# Altium PCB caja conexion.PcbDoc
Units mil, origin at the board's own origin, x right, y up, seen from the top; angles counter-clockwise.
Board outline 5920 x 5130 mil, 2 copper layers (Top Layer, Bottom Layer); 69 components, 31 nets, 195 pads, 28 vias.
Unrouted connection lines stored in the file: 2.
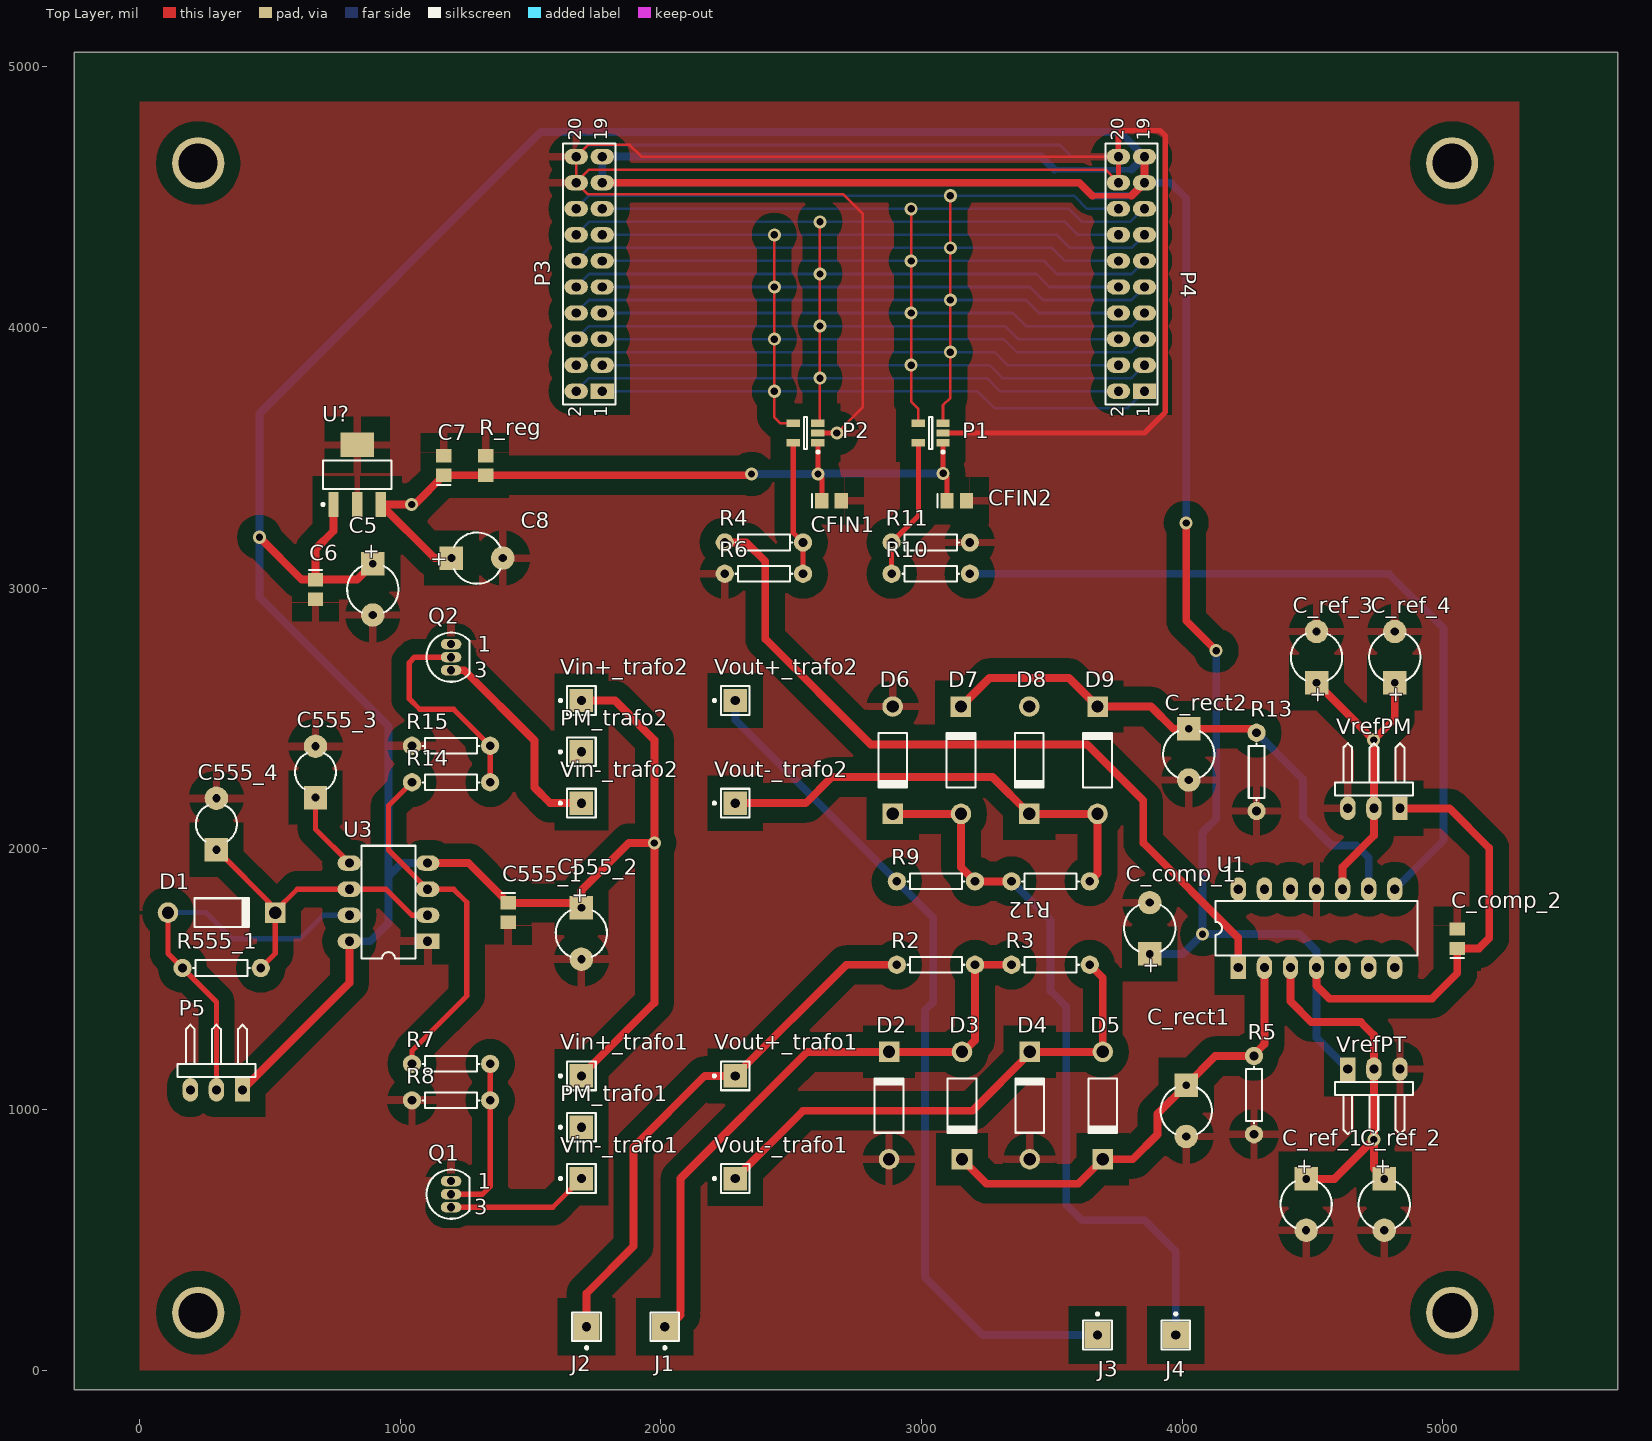
[diagram p0: Top Layer view]
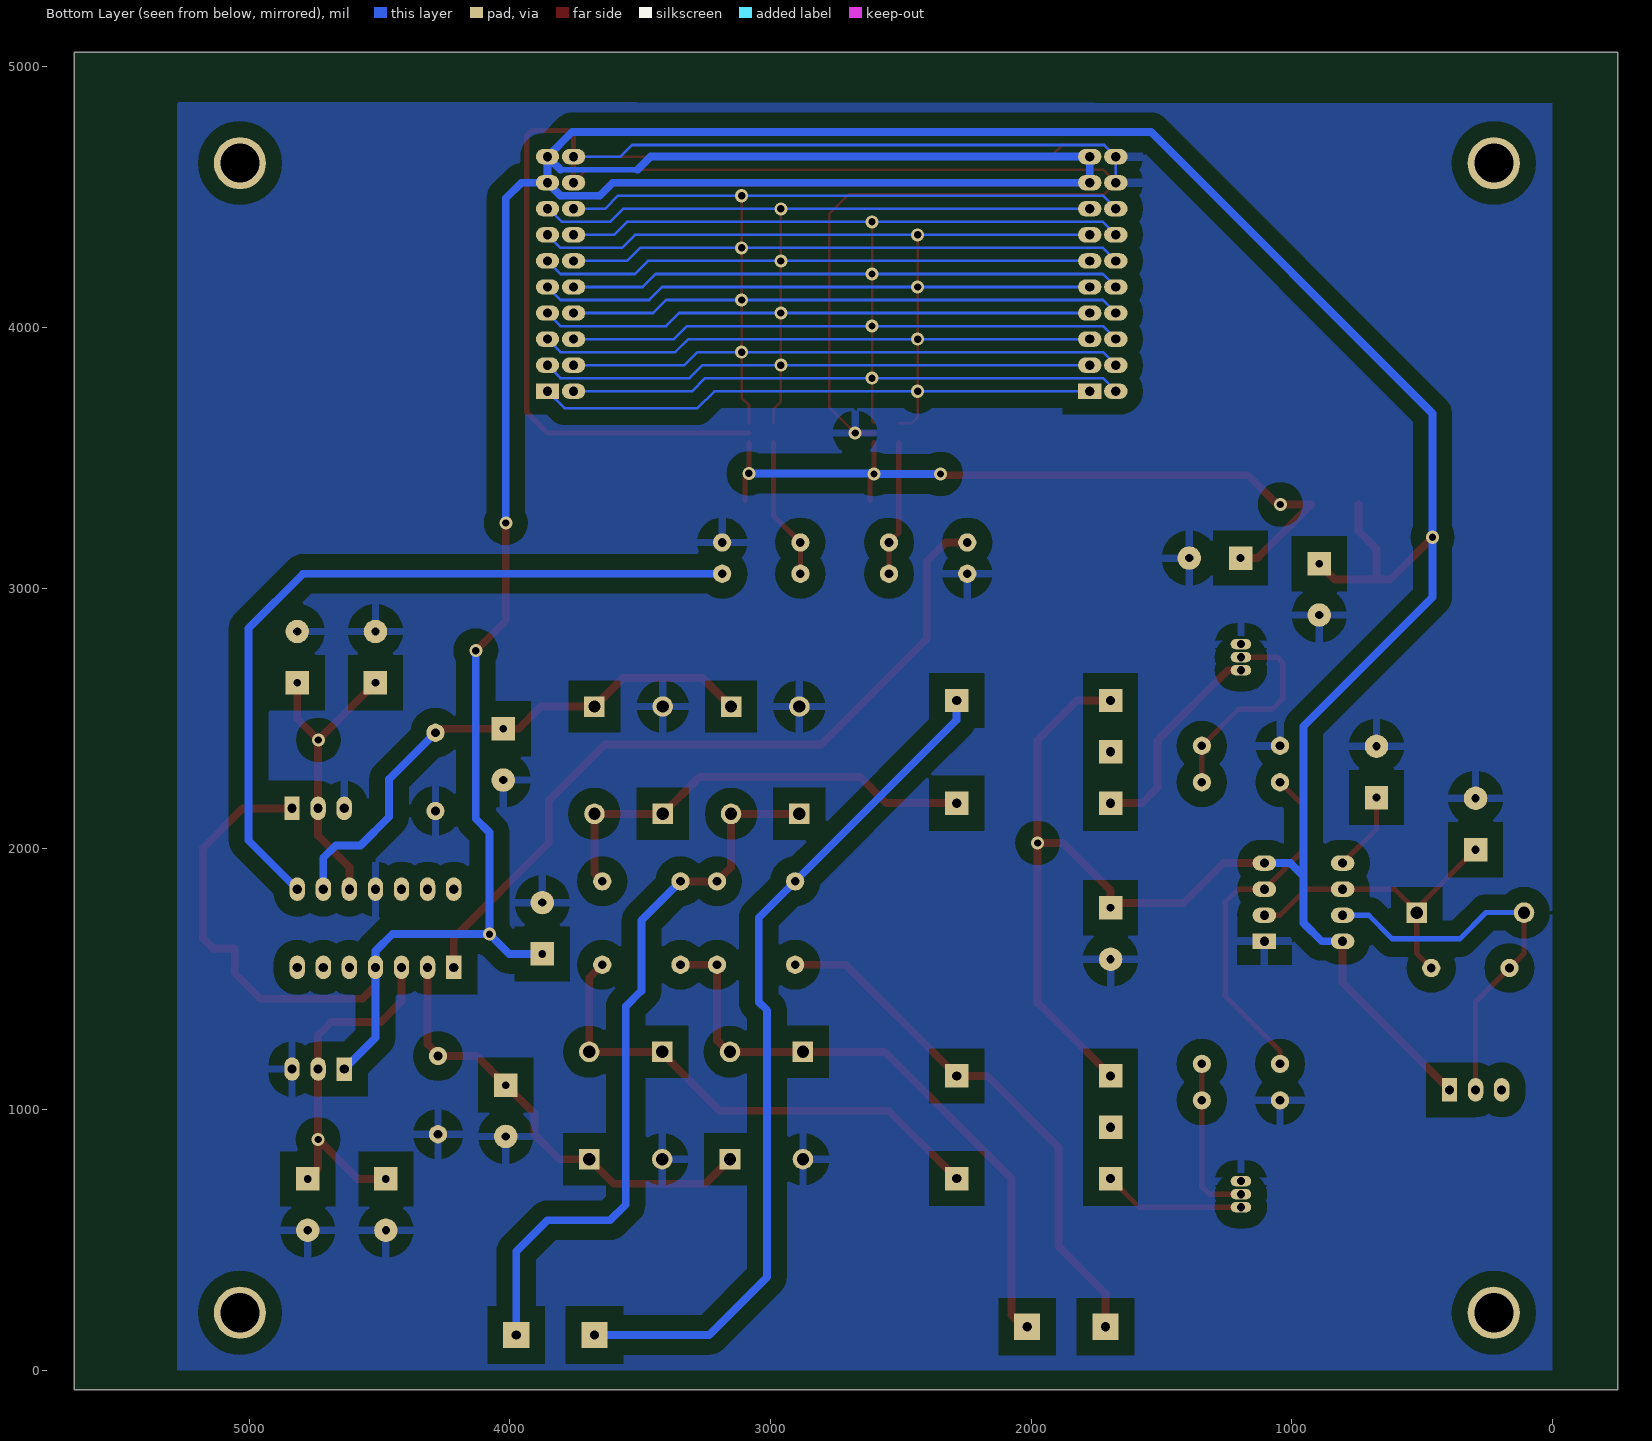
[diagram p1: Bottom Layer view, seen from below]

## Layer stack, top to bottom
Top Layer: signal copper 1.4
Dielectric: dielectric 12.6, FR-4, Dk 4.8
Bottom Layer: signal copper 1.4

## Board outline
-250,5055 -250,-75 5665,-75 5670,-75 5670,5055

## Design rules (kind name [scope] priority, off if disabled: settings)
Clearance [All] p1: gap=60
PolygonConnect PolygonConnect_1 [All vs IsNamedPolygon('TOP_ISO') Or  IsNamedPolygon('TOP_ISO')] p1: connectstyle=Relief reliefconductorwidth=30 reliefentries=4 polygonreliefangle="90 Angle"
PolygonConnect [All] p2: connectstyle=Relief reliefconductorwidth=10 reliefentries=4 polygonreliefangle="90 Angle"
RoomDefinition trafo2 [InComponentClass('trafo2')] p1: confinementstyle=ConfineIn formatcopy=TRUE lockcomponents=FALSE outline -420,-20 5655,-20 5655,5830 -420,5830
RoomDefinition trafo1 [InComponentClass('trafo1')] p2: confinementstyle=ConfineIn formatcopy=TRUE lockcomponents=FALSE outline -185,-20 5490,-20 5490,4995 -185,4995
RoomDefinition conexion [InComponentClass('conexion')] p3: confinementstyle=ConfineIn formatcopy=TRUE lockcomponents=FALSE outline -525,-65 6460,-65 6460,5235 -525,5235
RoutingVias [All] p1: holewidth=28 width=50 viastyle="Through Hole" minholewidth=28 minwidth=50 maxholewidth=28 maxwidth=50
SilkscreenOverComponentPads [All] p1: minsilkscreentomaskgap=10
SolderMaskExpansion [All] p1: expansion=4
TestPointUsage [All] p1: valid=0 allowmultiple=FALSE
Testpoint [All] p1: side=3 testpointundercomponent=TRUE minsize=40 maxsize=100 preferedsize=60 minholesize=0 maxholesize=40 preferedholesize=32 testpointgrid=1 style=297 order=0-112345678
Width [All] p1: maxlimit=100 minlimit=20 preferedwidth=20
23 further rules are at their usual default settings.

## Classes and differential pairs
component class conexion: C5 C6 C7 C8 C555_1 C555_2 C555_3 C555_4 C? C_comp_1 C_comp_2 C_rect1 C_rect2 C_ref_1 C_ref_2 C_ref_3 C_ref_4 CFIN1 CFIN2 D1 D2 D3 D4 D5 D6 D7 D8 D9 J1 J2 J3 J4 P1 P2 P3 P4 P5 Q1 Q2 R2 R3 R4 R5 R6 R7 R8 R9 R10 R11 R12 R13 R14 R15 R555_1 R_reg U1 U3 U? VrefPM VrefPT
component class trafo1: PM_trafo1 Vin+_trafo1 Vin-_trafo1 Vout+_trafo1 Vout-_trafo1
component class trafo2: PM_trafo2 Vin+_trafo2 Vin-_trafo2 Vout+_trafo2 Vout-_trafo2
channel class trafo: trafo1 trafo2

## Components (designator, comment, footprint, x,y, rotation, side; value= is the part's Value field where it differs from the comment)
C5 "Cap Pol1" CAPPR5-5x5 895,2995 r270 top
C6 "Cap Pol3" C0805 675,2995 r270 top
C7 "Cap Pol3" C0805 1167.5,3470 r90 top
C8 "Cap Pol1" CAPPR5-5x5 1295,3115 r0 top
C555_1 "Cap Pol3" C0805 1415,1755 r270 top
C555_2 "Cap Pol1" CAPPR5-5x5 1695,1675 r270 top
C555_3 "Cap2" CAPR5-4X5 675,2295 r90 top
C555_4 "Cap2" CAPR5-4X5 295,2095 r90 top
C_comp_1 "Cap Pol1" CAPPR5-5x5 3875,1695 r90 top
C_comp_2 "Cap Pol3" C0805 5055,1655 r90 top
C_rect1 "Cap Pol1" CAPPR5-5x5 4015,995 r270 top
C_rect2 "Cap Pol1" CAPPR5-5x5 4025,2361.91 r270 top
C_ref_1 "Cap Pol1" CAPPR5-5x5 4475,635 r270 top
C_ref_2 "Cap Pol1" CAPPR5-5x5 4775,635 r270 top
C_ref_3 "Cap Pol1" CAPPR5-5x5 4515,2735 r90 top
C_ref_4 "Cap Pol1" CAPPR5-5x5 4815,2735 r90 top
CFIN1 "Cap Pol3" C0805 2655,3335 r0 top
CFIN2 "Cap Pol3" C0805 3135,3335 r0 top
D1 "1N4148" DO-41 315,1755 r0 top
D2 "1N4148" DO-41 2875,1015 r90 top
D3 "1N4148" DO-41 3155,1015 r270 top
D4 "1N4148" DO-41 3415,1015 r90 top
D5 "1N4148" DO-41 3695,1015 r270 top
D6 "1N4148" DO-41 2889,2339.66 r270 top
D7 "1N4148" DO-41 3151,2339.66 r90 top
D8 "1N4148" DO-41 3413,2339.66 r270 top
D9 "1N4148" DO-41 3675,2339.66 r90 top
J1 "PT" PIN1#1 2015,166.5 r180 top
J2 "Socket" PIN1#1 1715,166.5 r180 top
J3 "Socket" PIN1#1 3675,135 r0 top
J4 "PM" PIN1#1 3975,135 r0 top
P1 "FIN1001" SOT23-5AM 3035,3595 r180 top
P2 "FIN1001" SOT23-5AM 2555,3595 r180 top
P3 "Header 10X2" HDR2X10 1775,3755 r90 top
P4 "Header 10X2" HDR2X10 3855,3755 r90 top
P5 "pote 20K" HDR1X3H 395,1075 r180 top
PM_trafo1 "Socket" PIN1#2 1695,931.85 r90 top (schematic designator PM)
PM_trafo2 "Socket" PIN1#2 1695,2371.85 r90 top (schematic designator PM)
Q1 "BC337" SOT54 1195,675 r0 top
Q2 "BC337" SOT54 1195,2735 r0 top
R2 "Res1" AXIAL-0.3 3055,1555 r0 top
R3 "Res1" AXIAL-0.3 3495,1555 r180 top
R4 "Res1" AXIAL-0.3 2395,3175 r180 top
R5 "Res1" AXIAL-0.3 4275,1055 r90 top
R6 "Res1" AXIAL-0.3 2395,3055 r180 top
R7 "Res1" AXIAL-0.3 1195,1175 r0 top
R8 "Res1" AXIAL-0.3 1195,1035 r0 top
R9 "Res1" AXIAL-0.3 3055,1875 r0 top
R10 "Res1" AXIAL-0.3 3035,3055 r0 top
R11 "Res1" AXIAL-0.3 3035,3175 r0 top
R12 "Res1" AXIAL-0.3 3495,1875 r180 top
R13 "Res1" AXIAL-0.3 4285,2295 r90 top
R14 "Res1" AXIAL-0.3 1195,2255 r0 top
R15 "Res1" AXIAL-0.3 1195,2395 r0 top
R555_1 "Res1" AXIAL-0.3 315,1542.65 r180 top
R_reg "Res Semi" 2012[0805] 1327.5,3470 r270 top
U1 "LM324N" 646-06 4515,1695 r0 top
U3 "NE555N" DIP8 955,1795 r90 top
U? "LM3940IMP-3.3" MP04A_N 835,3435 r90 top
Vin+_trafo1 "Socket" PIN1#2 1695,1128.7 r90 top (schematic designator Vin+)
Vin+_trafo2 "Socket" PIN1#2 1695,2568.7 r90 top (schematic designator Vin+)
Vin-_trafo1 "Socket" PIN1#2 1695,735 r90 top (schematic designator Vin-)
Vin-_trafo2 "Socket" PIN1#2 1695,2175 r90 top (schematic designator Vin-)
Vout+_trafo1 "Socket" PIN1#2 2285.55,1128.7 r90 top (schematic designator Vout+)
Vout+_trafo2 "Socket" PIN1#2 2285.55,2568.7 r90 top (schematic designator Vout+)
Vout-_trafo1 "Socket" PIN1#2 2285.55,735 r90 top (schematic designator Vout-)
Vout-_trafo2 "Socket" PIN1#2 2285.55,2175 r90 top (schematic designator Vout-)
VrefPM "pote 20K" HDR1X3H 4835,2155 r180 top
VrefPT "pote 20K" HDR1X3H 4635,1155 r0 top

## Footprints (in the part's own frame and the unit in brackets; to place one, negate y for a bottom-side part, rotate by r counter-clockwise, add the part's x,y. Pads: shape width x height; smd on the part's side, far side on the other; paste and mask are expansions set on the pad)
646-06 [mm] "DIP; 14 Leads; Row Spacing 7.62 mm; Pitch 2.54 mm"
  rect 1.5x2.286 hole 0.9: 1(-7.62,-3.81)
  oval 1.5x2.286 hole 0.9: 2(-5.08,-3.81) 3(-2.54,-3.81) 4(0,-3.81) 5(2.54,-3.81) 6(5.08,-3.81) 7(7.62,-3.81) 8(7.62,3.81) 9(5.08,3.81) 10(2.54,3.81) 11(0,3.81) 12(-2.54,3.81) 13(-5.08,3.81) 14(-7.62,3.81)
  silkscreen extent -9.85,-2.65 9.85,2.65
2012[0805] [mm] "Chip Resistor; Body 2.0 x 1.3 mm (LxW typ)"
  rect 1.3x1.5 smd: 1(-0.95,0) 2(0.95,0)
AXIAL-0.3 [mil] "Resistor; 2 Leads"
  round 70 hole 33.46: 1(-150,0) 2(150,0)
  silkscreen extent -109,-30 109,30
C0805 [mm] "Chip Capacitor; Body 2.0 x 1.2 mm (LxW typ)"
  rect 1.3x1.5 smd: 1(-0.95,0) 2(0.95,0)
  silkscreen extent -1.9,-0.65 -1.9,0.65
CAPPR5-5x5 [mil] "Capacitor, Electrolytic, Radial; Body 5 x 5 mm (Dia.xH typ); Pin Spacing 5 mm (typ)"
  rect 90x90 hole 29.53: 1(-98.43,0)
  round 90 hole 31.5: 2(98.43,0)
  silkscreen extent -89,-98 89,98
CAPR5-4X5 [mil] "Capacitor; 2 Leads"
  rect 90x90 hole 31.5: 1(-98.43,0)
  round 90 hole 31.5: 2(98.43,0)
  silkscreen extent -66,-79 72,79
DIP8 [mm] "DIP; 8 Leads; Row Spacing 7.62 mm; Pitch 2.54 mm"
  rect 1.5x2.286 hole 0.9: 1(-3.81,-3.81)
  oval 1.5x2.286 hole 0.9: 2(-1.27,-3.81) 3(1.27,-3.81) 4(3.81,-3.81) 5(3.81,3.81) 6(1.27,3.81) 7(-1.27,3.81) 8(-3.81,3.81)
  silkscreen extent -5.5,-2.65 5.5,2.65
DO-41 [mm] "Diode, Axial; Body 5.2 x 2.7 mm (LxDia. max), Lead Dia. 0.86 mm (max)"
  round 2 hole 1.2: 1(-5.23,0)
  rect 2x2 hole 1.2: 2(5.23,0)
  silkscreen extent -2.65,-1.41 2.75,1.4
HDR1X3H [mm] "Connector; Header; 3 Position; Right Angle"
  rect 1.5x2.286 hole 0.9: 1(0,0)
  oval 1.5x2.286 hole 0.9: 2(2.54,0) 3(5.08,0)
  silkscreen extent -1.27,-6.35 6.35,-1.27
HDR2X10 [mm] "Connector; Header; 10x2 Position"
  rect 1.5x2.286 hole 0.9: 1(0,0)
  oval 1.5x2.286 hole 0.9: 2(0,2.54) 3(2.54,0) 4(2.54,2.54) 5(5.08,0) 6(5.08,2.54) 7(7.62,0) 8(7.62,2.54) 9(10.16,0) 10(10.16,2.54) 11(12.7,0) 12(12.7,2.54) 13(15.24,0) 14(15.24,2.54) 15(17.78,0) 16(17.78,2.54) 17(20.32,0) 18(20.32,2.54) 19(22.86,0) 20(22.86,2.54)
  silkscreen extent -1.27,-1.27 24.13,3.81
MP04A_N [mm] "SOT223, 4-Leads, Body 6.5x3.5mm, Pitch 2.3mm, Lead Span 7mm, IPC Medium Density"
  rect 2.4x1 smd: 1(-2.9,2.3) 2(-2.9,0) 3(-2.9,-2.3)
  rect 2.4x3.3 smd: 4(2.9,0)
  silkscreen extent -3.02,-3.35 1.4,3.47, body extent -1.85,-3.35 1.85,3.35, height 1.8
PIN1#1 [mm] "Connector; Plug"
  rect 2.54x2.54 hole 0.9: 1(0,0)
  silkscreen extent -1.4,-1.4 1.4,2.17
PIN1#2 [mm] "Connector; Plug"
  rect 2.286x2.286 hole 0.9: 1(0,0)
  silkscreen extent -1.4,-1.4 1.4,2.17
SOT23-5AM [mm] "SOT23, 5-Leads, Body 2.9x1.7mm, Pitch 0.95mm, Lead Span 2.8mm, IPC Low Density"
  rect 1.3x0.7 smd: 1(-1.2,0.95) 2(-1.2,0) 3(-1.2,-0.95) 4(1.2,-0.95) 5(1.2,0.95)
  silkscreen extent -1.33,-1.55 0.15,1.97, body extent -0.9,-1.55 0.9,1.55, height 1.45
SOT54 [mm] "TO, Flat Index; 3 In-Line, Axial Leads; Body Dia. 4.6mm; Leads 0.48 x 0.45 mm (max)"
  oval 2x1 hole 0.8: 1(0,1.27) 2(0,0) 3(0,-1.27)
  silkscreen extent -2.4,-2.4 1.8,2.4

## Part data
C5 C8 C555_2 C_comp_1 C_rect1 C_rect2 C_ref_1 C_ref_2 C_ref_3 C_ref_4: "Polarized Capacitor (Radial)"
C6 C7 C555_1 C_comp_2 CFIN1 CFIN2: "Polarized Capacitor (Surface Mount)"
C555_3 C555_4: "Capacitor"
D1 D2 D3 D4 D5 D6 D7 D8 D9: library part "Diode 1N4001", "1 Amp General Purpose Rectifier"
J1 J4: library part Socket, "Socket"
P1 P2: library part "Header 3X2", "Header, 3-Pin, Dual row"
P3 P4: "Header, 10-Pin, Dual row"
P5 VrefPM VrefPT: library part "Header 3H", "Header, 3-Pin, Right Angle"
Q1 Q2: "NPN General-purpose Transistor"
R2 R3 R4 R5 R6 R7 R8 R9 R10 R11 R12 R13 R14 R15 R555_1: "Resistor"
R_reg: "Semiconductor Resistor"
U1: "Quad Differential Input, Low-Power Operational Amplifier"
U3: "General-Purpose Single Bipolar Timer"
U?: "1A Low Dropout Regulator for 5V to 3.3V Conversion"

## Free pads (board coordinates)
  round 200 hole 150: 0(225,4630) 1(5035,4630) 2(5035,220) 3(225,220)

## Via types
v1: diameter 50, hole 28, Top Layer to Bottom Layer, 28 vias

## Nets (pads, with @x,y where several pads share a name; then routed paths per layer and width w, separated by ;. In a path a pad name is that pad's centre, name@x,y a point inside that pad or via, vN(x,y) a via of type N, cw(c..) or ccw(c..) an arc to the next point about the centre after c; other vN are vias at no path point)
3.3V: C7.1 C8.1 CFIN1.1 CFIN2.1 P1.1 P2.1 R_reg.2 U?.3 | length 3014.7
  Top Layer w20: P2.1 2602.24,3437.5 2617.6,3422.15 CFIN1.1 ; P1.1@3082.5,3557.34 v1(3082.5,3440) 3097.6,3424.9 CFIN2.1
  Top Layer w30: 1128.19,3118.19 U?.3 v1(1044.07,3320.83) 1055.73,3320.83 C7.1 R_reg.2 2342.4,3432.6 v1(2347.5,3437.7) ; 1131.38,3115 C8.1
  Bottom Layer w30: v1(2347.5,3437.7) v1@2615,3437.7 ; v1@2615,3440 v1(3082.5,3440)
  other v1: 2602.5,3437.5
_PM1+: P1.4 P3.3 P3.7 P3.11 P3.15 P4.3 P4.7 P4.11 P4.15 | length 9369.8
  Top Layer w10: v1(2960,4455) v1(2960,4255) v1(2960,4055) v1(2960,3855) 2960,3715 2987.76,3687.24 P1.4
  Bottom Layer w10: P3.3 v1(2960,3855) ; P3.7 v1(2960,4055) 3350,4055 3400,4005 3805,4005 P4.7 ; P3.11 v1(2960,4255) 3470,4255 3520,4205 3805,4205 P4.11 ; P3.15 v1(2960,4455) 3565,4455 3615,4405 3800,4405 3850,4455 P4.15 ; 3010,3855 v1(2960,3855) ; P4.3 3805,3805 3310,3805 3260,3855 v1(2960,3855)
_PM1-: P1.3 P3.4 P3.8 P3.12 P3.16 P4.4 P4.8 P4.12 P4.16 | length 9369.8
  Top Layer w10: P1.3 3082.24,3702.24 3110,3730 3110,3815 v1(3110,3905) v1(3110,4105) v1(3110,4305) v1(3110,4505)
  Bottom Layer w10: P3.4 1725,3905 v1(3110,3905) 3280,3905 3330,3855 P4.4 ; P3.8 1725,4105 v1(3110,4105) 3400,4105 3450,4055 P4.8 ; P3.12 1725,4305 v1(3110,4305) 3500,4305 3550,4255 P4.12 ; P3.16 1725,4505 v1(3110,4505) 3585,4505 3635,4455 P4.16
_PT1+: P2.4 P3.1 P3.5 P3.9 P3.13 P4.1 P4.5 P4.9 P4.13 | length 9280.2
  Top Layer w10: v1(2435,4355) v1(2435,4155) v1(2435,3955) v1(2435,3755) 2435,3655 2457.6,3632.4 P2.4
  Bottom Layer w10: P3.1 v1(2435,3755) 3215,3755 3280,3690 3790,3690 P4.1 ; P3.5 v1(2435,3955) 3315,3955 3365,3905 3805,3905 P4.5 ; P3.9 v1(2435,4155) 3415,4155 3465,4105 3805,4105 P4.9 ; P3.13 v1(2435,4355) 3520,4355 3570,4305 3805,4305 P4.13
_PT1-: P2.3 P3.2 P3.6 P3.10 P3.14 P4.2 P4.6 P4.10 P4.14 | length 9261.5
  Top Layer w10: P2.3 2610,3640.16 v1(2610,3805) v1(2610,4005) v1(2610,4205) v1(2610,4405)
  Bottom Layer w10: P3.2 1725,3805 v1(2610,3805) 3250,3805 3300,3755 P4.2 ; P3.6 1725,4005 v1(2610,4005) 3320,4005 3370,3955 P4.6 ; P3.10 1725,4205 v1(2610,4205) 3440,4205 3490,4155 P4.10 ; P3.14 1725,4405 v1(2610,4405) 3550,4405 3600,4355 P4.14
GND_ISO: C5.2 C6.2 C7.2 C8.2 C555_1.2 C555_2.2 C555_3.2 C555_4.2 C_comp_1.2 C_comp_2.2 C_rect1.2 C_rect2.2 C_ref_1.2 C_ref_2.2 C_ref_3.2 C_ref_4.2 CFIN1.2 CFIN2.2 D2.1 D4.1 D6.1 D8.1 P1.2 P2.2 P3.18 P3.20 P4.18 P4.20 Q1.1 Q2.1 R5.1 R6.2 R8.1 R11.2 R13.1 R15.1 R_reg.1 U1.11 U3.1 U?.2 U?.4 VrefPM.3 VrefPT.3 | length 10981.9
  Top Layer w10: v1(2675,3595) 2775,3695 2775,4435 2699.53,4510.47 1719.53,4510.47 P3.18 ; P4.18 3705,4605 1725,4605 P3.18 ; P4.20 1925,4655 1880,4700 1720,4700 P3.20 P3.18
  Top Layer w20: P2.2 v1(2675,3595) ; P1.2 3855,3595 3935,3675 3935,4735 3915,4755 3775,4755 3755,4735 P4.20 P4.18
  Bottom Layer w10: P3.18 P3.20 1719.53,4699.53 3530.47,4699.53 3575,4655 P4.20
NetC555_3_1: C555_3.1 U3.5 | length 305.4
  Top Layer w20: C555_3.1 675,2075 U3.5
NetC555_4_1: C555_4.1 D1.2 R555_1.1 U3.2 U3.6 | length 1231
  Top Layer w20: C555_4.1 520.91,1770.67 D1.2@520.91,1760.91 ; R555_1.1 520.91,1598.55 D1.2 D1.2@520.91,1760.91 ; U3.2 1045,1745 945,1845 U3.6 605,1845 D1.2@520.91,1760.91
NetC_rect1_1: C_rect1.1 D3.2 D5.2 R5.2 U1.2 | length 1762.1
  Top Layer w30: D3.2 3249.09,715 3600.91,715 D5.2 3810,809.09 3905,904.09 3905,983.43 C_rect1.1 4126.57,1205 4270,1205 4315,1250 U1.2
NetC_rect2_1: C_rect2.1 D7.2 D9.2 R13.2 U1.9 | length 2100.1
  Top Layer w30: D7.2 3260.43,2655 3565.57,2655 D9.2 3880.24,2545.57 3965.47,2460.33 C_rect2.1 4269.67,2460.33 R13.2
  Bottom Layer w30: R13.2 4462.5,2267.5 4462.5,2122.5 4572.5,2012.5 4667.5,2012.5 4715,1965 U1.9
NetC_ref_1_1: C_ref_1.1 C_ref_2.1 U1.3 VrefPT.2 | length 1394.8
  Top Layer w30: U1.3 4415,1415 4495,1335 4685,1335 4735,1285 VrefPT.2 v1(4735,885) ; C_ref_1.1 4583.43,733.43 v1(4735,885) ; C_ref_2.1 4735,773.43 v1(4735,885)
NetC_ref_3_1: C_ref_3.1 C_ref_4.1 U1.10 VrefPM.2 | length 1185.5
  Top Layer w30: C_ref_3.1 v1(4734.07,2417.5) v1@4735,2418.43 ; U1.10 4615,1930 4735,2050 VrefPM.2 v1@4735,2418.43 ; C_ref_4.1 4815,2498.43 v1@4735,2418.43
NetD1_1: D1.1 P5.2 R555_1.2 U3.7 | length 1531.6
  Top Layer w20: D1.1 109.09,1598.55 R555_1.2 295,1412.65 P5.2
  Bottom Layer w20: D1.1 255,1755 355,1655 615,1655 705,1745 U3.7
NetD2_2: D2.2 D3.1 J1.1 R2.2 R3.2 | length 2392.8
  Top Layer w30: J1.1@2015,150.94 2075,210.94 ; 2075,226.5 2075,735 2560.91,1220.91 D2.2 D3.1 ; D3.1@3140.91,1235 D3.1 ; R3.2 R2.2 3205,1265 3160.91,1220.91 D3.1
NetD4_2: D4.2 D5.1 R3.1 Vout-_trafo1.1 | length 1963.1
  Top Layer w30: Vout-_trafo1.1 2545.55,995 3195,995 D4.2@3415,1215 ; D4.2 D5.1 3695,1505 R3.1
NetD6_2: D6.2 D7.1 J4.1 R9.2 R12.2 | length 2824.7
  Top Layer w30: D6.2 D7.1 3151,1929 R9.2 R12.2
  Bottom Layer w30: R12.2 3495,1725 3495,1455 3555,1395 3555,635 3615,575 3855,575 3975,455 J4.1
NetD8_2: D8.2 D9.1 R12.1 Vout-_trafo2.1 | length 1760.6
  Top Layer w30: Vout-_trafo2.1 2555,2175 2655,2275 3271.75,2275 D8.2 D9.1 3675,1905 R12.1
NetJ2_1: J2.1 R2.1 Vout+_trafo1.1 | length 2078.6
  Top Layer w30: J2.1@1715,150.94 1715,295 1895,475 1895,855 2168.7,1128.7 Vout+_trafo1.1 2711.85,1555 R2.1
NetJ3_1: J3.1 R9.1 Vout+_trafo2.1 | length 3293.9
  Bottom Layer w30: Vout+_trafo2.1 2285.55,2494.45 R9.1 3045,1735 3045,1412.5 3012.5,1380 3012.5,357.5 3235,135 J3.1
NetP1_5: P1.5 R10.1 R11.1 | length 545.2
  Top Layer w20: R10.1 R11.1 2987.76,3277.76 P1.5
NetP2_5: P2.5 R4.1 R6.1 | length 518
  Top Layer w20: P2.5 2507.76,3212.24 R4.1 R6.1
NetPM_trafo1_1: PM_trafo1.1
NetPM_trafo2_1: PM_trafo2.1
NetQ1_2: Q1.2 R7.2 R8.2 | length 632.4
  Top Layer w20: Q1.2 1315,675 1345,705 R8.2 R7.2
NetQ1_3: Q1.3 Vin-_trafo1.1 | length 545.6
  Top Layer w20: Q1.3 1585,625 Vin-_trafo1.1
NetQ2_2: Q2.2 R14.2 R15.2 | length 832.8
  Top Layer w20: Q2.2 1055,2735 1035,2715 1035,2575 1075,2535 1205,2535 R15.2 R14.2
NetQ2_3: Q2.3 Vin-_trafo2.1 | length 816.7
  Top Layer w30: Q2.3 1245,2685 1515,2415 1515,2235 1575,2175 Vin-_trafo2.1
NetR4_2: R4.2 U1.1 | length 2980.5
  Top Layer w30: R4.2 2327.5,3175 2400,3102.5 2400,2805 2805,2400 3635,2400 3850,2185 3850,2022.5 4215,1657.5 U1.1
NetR7_1: R7.1 R14.1 U3.3 | length 1387.1
  Top Layer w20: R7.1 1045,1225 1255,1435 1255,1795 1205,1845 U3.3 955,1995 955,2165 R14.1
NetR10_2: R10.2 U1.8 | length 2982.1
  Bottom Layer w30: R10.2 4792.5,3055 5002.5,2845 5002.5,2032.5 U1.8
VCC: C5.1 C6.1 C555_1.1 C555_2.1 C_comp_1.1 C_comp_2.1 P3.17 P3.19 P4.17 P4.19 P5.1 U1.4 U3.4 U3.8 U?.1 Vin+_trafo1.1 Vin+_trafo2.1 VrefPM.1 VrefPT.1 | length 23404.2
  Top Layer w20: 3655,4505 3805,4505
  Top Layer w30: P5.1 805,1485 U3.8 ; v1(460,3195) 622.6,3032.4 C6.1 ; U?.1 744.45,3219.45 675,3150 C6.1 ; C5.1 833.98,3032.4 C6.1 ; U3.4 1262.4,1945 C555_1.1 1676.02,1792.4 C555_2.1 1695,1840 1877.5,2022.5 v1(1975,2022.5) ; Vin+_trafo1.1 1975,1408.7 v1(1975,2022.5) ; Vin+_trafo2.1 1823.8,2568.7 1975,2417.5 v1(1975,2022.5) ; P3.17 3605,4555 3655,4505 ; 3805,4505 P4.17 P4.19 ; v1(4015,3250) 4015,2875 v1(4130,2760) ; U1.4 4515,1475 4565,1425 4957.5,1425 5055,1522.5 C_comp_2.1 5137.6,1617.6 5177.5,1657.5 5177.5,2002.5 5025,2155 VrefPM.1
  Bottom Layer w20: 3510,4605 3805,4605
  Bottom Layer w30: U3.8 885,1645 955,1715 955,1895 ; U3.4 1005,1945 955,1895 ; 3510,4605 3460,4655 P3.19 P3.17 3605,4555 3655,4505 3805,4505 P4.17 ; 3805,4605 P4.19 ; C_comp_1.1 4001.57,1596.57 4077.5,1672.5 ; v1(4015,3250) 4015,4495 3955,4555 P4.17 ; v1(4130,2760) 4130,2115 4077.5,2062.5 4077.5,1672.5 ; VrefPT.1 4515,1275 U1.4 4515,1607.5 4450,1672.5 4077.5,1672.5 ; 955,1895 955,2470 460,2965 v1(460,3195) 460,3670 1540,4750 3760,4750 P4.19 ; P4.17 P4.19
pads on no net: P5.3 U1.5 U1.6 U1.7 U1.12 U1.13 U1.14
copper on no net: | length 1340.2
  Top Layer w30: 1055.73,3320.83 1167.5,3432.6 1327.5,3432.6 2342.4,3432.6 2347.5,3437.7
  other v1: 4077.5,1672.5

## Polygon pours and split planes (outlines as drawn)
GND_ISO on Top Layer "TOP_ISO" (solid, remove dead copper, pour order 1001): 0,4865 0,0 5360,0 5292.7,0 5292.7,4865
GND_ISO on Bottom Layer "TOP_ISO" (solid, remove dead copper, pour order 1000): 0,4860 0,0 5275,0 5275,4865

## Text inside footprints (layer, text, board x,y; h text height)
C5: Top Overlay "+" at 865.47,3174.13 h59.06 r270
C8: Top Overlay "+" at 1115.87,3085.47 h59.06
C555_2: Top Overlay "+" at 1665.47,1854.13 h59.06 r270
C_comp_1: Top Overlay "+" at 3904.53,1515.87 h59.06 r90
C_ref_1: Top Overlay "+" at 4445.47,814.13 h59.06 r270
C_ref_2: Top Overlay "+" at 4745.47,814.13 h59.06 r270
C_ref_3: Top Overlay "+" at 4544.53,2555.87 h59.06 r90
C_ref_4: Top Overlay "+" at 4844.53,2555.87 h59.06 r90
P3: Top Overlay "20" at 1695,4715 h50 r90; Top Overlay "19" at 1795,4715 h50 r90; Top Overlay "1" at 1795,3655 h50 r90; Top Overlay "2" at 1695,3655 h50 r90
P4: Top Overlay "20" at 3775,4715 h50 r90; Top Overlay "19" at 3875,4715 h50 r90; Top Overlay "1" at 3875,3655 h50 r90; Top Overlay "2" at 3775,3655 h50 r90
Q1: Top Overlay "3" at 1284.57,595.47 h59.06; Top Overlay "1" at 1297.99,695.47 h59.06
Q2: Top Overlay "3" at 1284.57,2655.47 h59.06; Top Overlay "1" at 1297.99,2755.47 h59.06